# Altium PCB shaolollc-usb_breakout_miniusb.PcbDoc
Units mm, origin at the board's own origin, x right, y up, seen from the top; angles counter-clockwise.
Board outline 25.65 x 11.85 mm, 2 copper layers (Top Layer, Bottom Layer), stack 1.595 mm thick; 6 components, 5 nets, 18 pads, 0 vias.
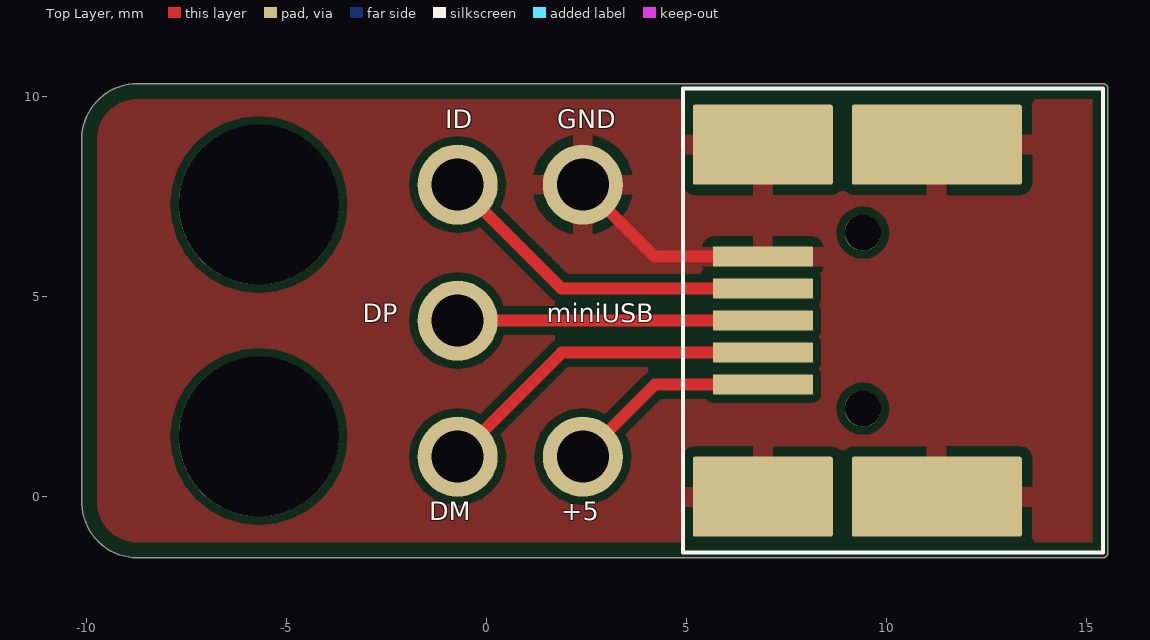
[diagram p0: Top Layer view]
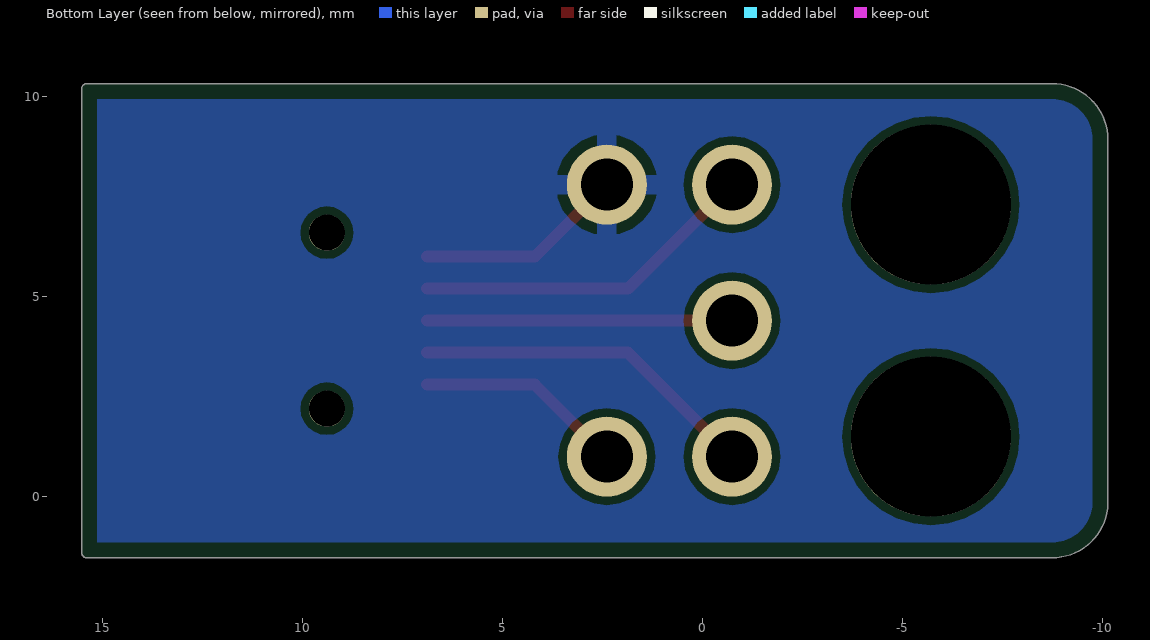
[diagram p1: Bottom Layer view, seen from below]

## Layer stack, top to bottom
Top Solder: solder mask 0.0254, Solder Resist, Dk 3.5
Top Layer: signal copper 0.0356
Dielectric 1: core 1.524, Dk 4.2
Bottom Layer: signal copper 0.0356
Bottom Solder: solder mask 0.0254, Solder Resist, Dk 3.5

## Board outline
-10.127,-0.16 -10.127,8.9 cw(c-10,8.9) -10.126,8.915 cw(c-10,8.93) -10.127,8.93 cw(c-8.73,8.93) -8.73,10.327 cw(c-8.73,10.2) -8.715,10.326 cw(c-8.7,10.2) -8.7,10.327 15.4,10.327 cw(c15.4,10.2) 15.527,10.2 15.527,-1.4 cw(c15.4,-1.4) 15.4,-1.527 -8.7,-1.527 cw(c-8.7,-1.4) -8.715,-1.526 cw(c-8.73,-1.4) -8.73,-1.527 cw(c-8.73,-0.13) -10.127,-0.174 cw(c-10,-0.16)

## Design rules (kind name [scope] priority, off if disabled: settings)
BoardOutlineClearance [All] p1: gap=0.381 ignorepadtopadclearanceinfootprint=FALSE
Clearance [All] p1: gap=0.2 ignorepadtopadclearanceinfootprint=FALSE
Height [All] p1: minheight=0 maxheight=33 prefheight=12.7
HoleSize [All] p1: absolutevalues=TRUE maxlimit=3.556 minlimit=0.254 maxpercent=80.000 minpercent=20.000
MinimumAnnularRing [All] p1: minimumring=0.127
MinimumSolderMaskSliver [All] p1: minsoldermaskwidth=0.102
PlaneClearance [All] p1: clearance=0.254
PlaneConnect [All] p1: pad.planeconnectstyle=Relief pad.reliefexpansion=0.508 pad.reliefentries=4 pad.reliefconductorwidth=0.508 pad.reliefairgap=0.254 via.planeconnectstyle=Direct via.reliefexpansion=0.508 via.reliefentries=4 via.reliefconductorwidth=0.254 via.reliefairgap=0.254
PolygonConnect [All] p1: thpad.connectstyle=Relief thpad.reliefconductorwidth=0.508 thpad.reliefentries=4 thpad.polygonreliefangle="90 Angle" thpad.airgapwidth=0.254 smdpad.connectstyle=Relief smdpad.reliefconductorwidth=0.508 smdpad.reliefentries=4 smdpad.polygonreliefangle="90 Angle" smdpad.airgapwidth=0.254 via.connectstyle=Direct via.reliefconductorwidth=0.254 via.reliefentries=4 via.polygonreliefangle="90 Angle" via.airgapwidth=0.254
RoutingCorners [All] p1: cornerstyle=45-Degree minsetback=0.508 maxsetback=2.54
RoutingVias RoutingVias_1 [InAnyComponent] p1: holewidth=0.25 width=0.25 viastyle="Through Hole" minholewidth=0.25 minwidth=0.25 maxholewidth=0.711 maxwidth=1.27
RoutingVias [All] p2: holewidth=0.254 width=0.508 viastyle="Through Hole" minholewidth=0.254 minwidth=0.508 maxholewidth=6.731 maxwidth=7.62
SilkToSilkClearance [All] p1: silktosilkclearance=0.127
SilkToSolderMaskClearance [IsPad] p1: minsilkscreentomaskgap=0 clearancetoexposedcopper=TRUE
SolderMaskExpansion [All] p1: expansion=0.076
UnRoutedNet [All] p1: checkbadconnections=TRUE
Width [All] p1: maxlimit=12.7 minlimit=0.152 preferedwidth=0.203
21 further rules are at their usual default settings.

## Classes and differential pairs
net class ID_Nets: NetID_1
net class GND_Nets: NetGND_1
net class DP_Nets: NetDP_1
net class DM_Nets: NetDM_1
net class +5_Nets: Net+5_1
net class miniUSB_Nets: Net+5_1 NetDM_1 NetDP_1 NetGND_1 NetID_1

## Components (designator, comment, footprint, x,y, rotation, side; value= is the part's Value field where it differs from the comment)
+5 "=Comment" 1.3_2.0MM_PH 2.4,1 r0 top value=1.3_2.0MM_MH
DM "=Comment" 1.3_2.0MM_PH -0.73,1 r0 top value=1.3_2.0MM_MH
DP "=Comment" 1.3_2.0MM_PH -0.73,4.4 r0 top value=1.3_2.0MM_MH
GND "=Comment" 1.3_2.0MM_PH 2.4,7.8 r0 top value=1.3_2.0MM_MH
ID "=Comment" 1.3_2.0MM_PH -0.73,7.8 r0 top value=1.3_2.0MM_MH
miniUSB "=Comment" "USB MINI B W PEGS - UJ2" 14.65,4.4 r90 top value=UJ2-MBH-1-SMT-TR

## Footprints (in the part's own frame and the unit in brackets; to place one, negate y for a bottom-side part, rotate by r counter-clockwise, add the part's x,y. Pads: shape width x height; smd on the part's side, far side on the other; paste and mask are expansions set on the pad)
1.3_2.0MM_PH [mm] "1.3mm Plated Hole with 2.0mm pad"
  round 2 hole 1.3 paste-2.54: 1(0,0)
"USB MINI B W PEGS - UJ2" [mm]
  rrect5% 2x3.5 smd: 0(-4.4,7.75) 0(4.4,7.75)
  rrect5% 2x4.25 smd: 0(-4.4,3.4) 0(4.4,3.4)
  rrect5% 0.5x2.5 smd mask+0.05: 1(-1.6,7.75) 2(-0.8,7.75) 3(0,7.75) 4(0.8,7.75) 5(1.6,7.75)
  round 0.9 hole 0.9 unplated: 6(-2.2,5.25) 6(2.2,5.25)
  silkscreen extent -5.8,-0.75 5.8,9.75, body extent -4.83,-0.69 4.83,8.71, height 4

## Part data
+5 DM DP GND ID: library part PCB_0092, "1.3_2.0MM_MH", Manufacturer="Misc PCB", Manufacturer Part Number=S46, ClassName="Plated Holes", ComponentLink1Description="Manufacturer URL", ComponentLink1URL=0, ComponentLink2Description="Datasheet URL", ComponentLink3Description="Package URL", Part Number=PCB_0092, Published=1/20/2015, Publisher=shawn@shaolo.com, Reviewer=shawn@shaolo.com, RoHS=True, Supplier 1=ShaoloLLC, UID=61
miniUSB: library part CONN_0247, "USB JACK 2.0, MINI B TYPE, 5 PIN", Manufacturer=Cui, Manufacturer Part Number=UJ2-MBH-1-SMT-TR, Supplier Part Number 1=102-4003-1-ND, ComponentLink1Description="Manufacturer URL", ComponentLink1URL=0, ComponentLink2Description="Datasheet URL", ComponentLink3Description="Package URL", Conductors=5, Gender?=Female, HelpURL=https://www.cui.com/product/resource/digikeypdf/uj2-mbh-smt.pdf, Orientation=RA, Part Number=CONN_0247, Published=4/1/2018, Publisher=shawn@shaolo.com, Reflow?=True, Reviewer=shawn@shaolo.com, RoHS=True, SMT?=True, Supplier 1=Digi-Key, UID=246

## Free pads (board coordinates)
  round 4 hole 4 unplated: 1(-5.7,1.5) 1(-5.7,7.3)

## Nets (pads, with @x,y where several pads share a name; then routed paths per layer and width w, separated by ;. In a path a pad name is that pad's centre, name@x,y a point inside that pad or via, vN(x,y) a via of type N, cw(c..) or ccw(c..) an arc to the next point about the centre after c; other vN are vias at no path point)
Net+5_1: +5.1 miniUSB.1 | length 5.9
  Top Layer w0.3: +5.1@1.9,0.539 +5.1@2.38,1.02 ; +5.1 4.2,2.8 miniUSB.1
NetDM_1: DM.1 miniUSB.2 | length 8.7
  Top Layer w0.3: DM.1 1.87,3.6 miniUSB.2
NetDP_1: DP.1 miniUSB.3 | length 7.6
  Top Layer w0.3: DP.1 miniUSB.3
NetGND_1: GND.1 miniUSB.0 miniUSB.5 | length 6
  Top Layer w0.3: GND.1@1.9,8.309 GND.1@2.405,7.805 ; GND.1 4.2,6 miniUSB.5
NetID_1: ID.1 miniUSB.4 | length 8.7
  Top Layer w0.3: ID.1 1.87,5.2 miniUSB.4
pads on no net: miniUSB.6

## Polygon pours and split planes (outlines as drawn)
NetGND_1 on Top Layer "NETGND_1_L01_P000" (solid, remove dead copper, pour order 0): -10,10.2 15.4,10.2 15.4,-1.4 -10,-1.4
NetGND_1 on Bottom Layer "NETGND_1_L02_P002" (solid, remove dead copper, pour order 2): -10,10.2 15.4,10.2 15.4,-1.4 -10,-1.4

## Silkscreen, mask and mechanical layers (free items; w line width, h text height)
Bottom Solder:
  drawing of 4 lines, arcs and shapes, not listed
M1-Outline:
  lines w0.254: -10,-0.13 ccw(c-8.73,-0.13) -8.73,-1.4 15.4,-1.4 15.4,10.2 -8.73,10.2 ccw(c-8.73,8.93) -10,8.93 -10,-0.13

## Dimensions
-8.73,10.2 to -8.73,-1.4 on M2-Dims
15.4,10.2 to -10,8.93 on M2-Dims